# EAGLE board ioboard (EAGLE 9.6.2)
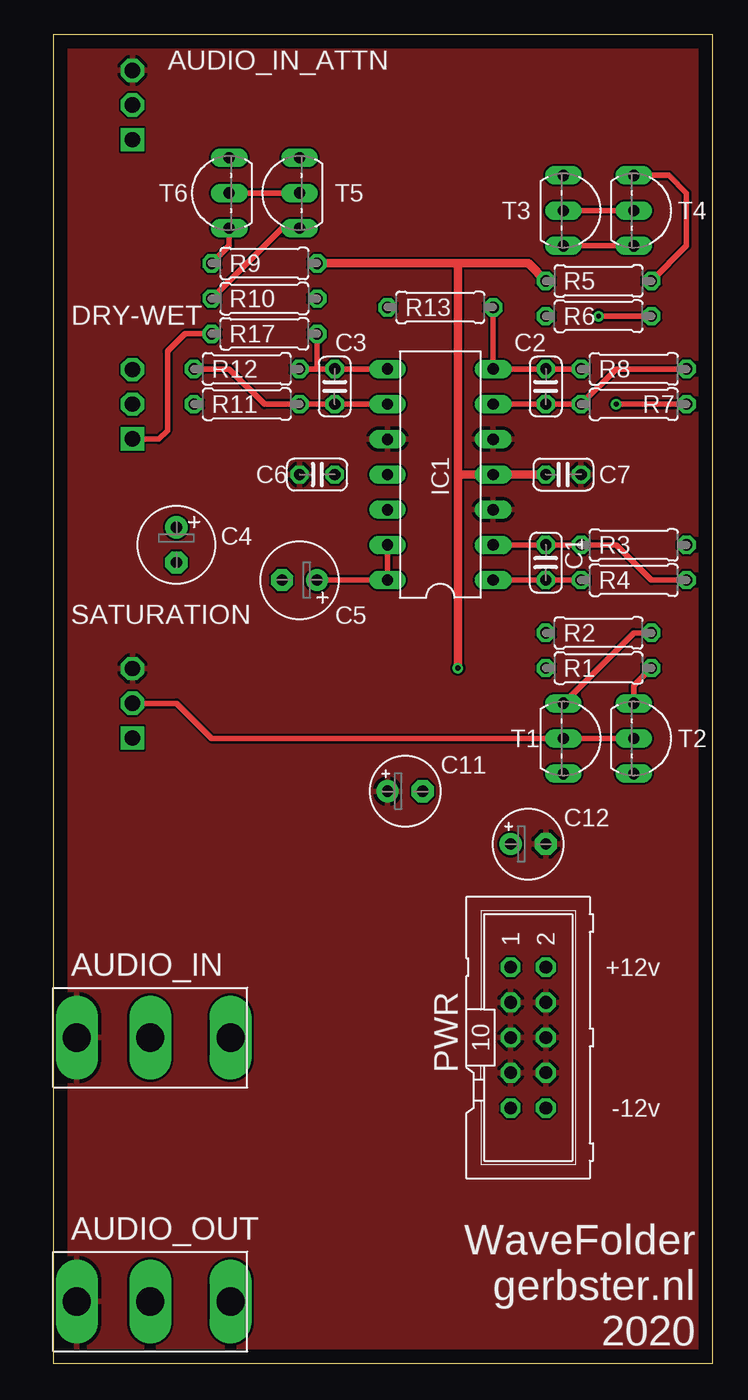
[diagram p0: board, top side]
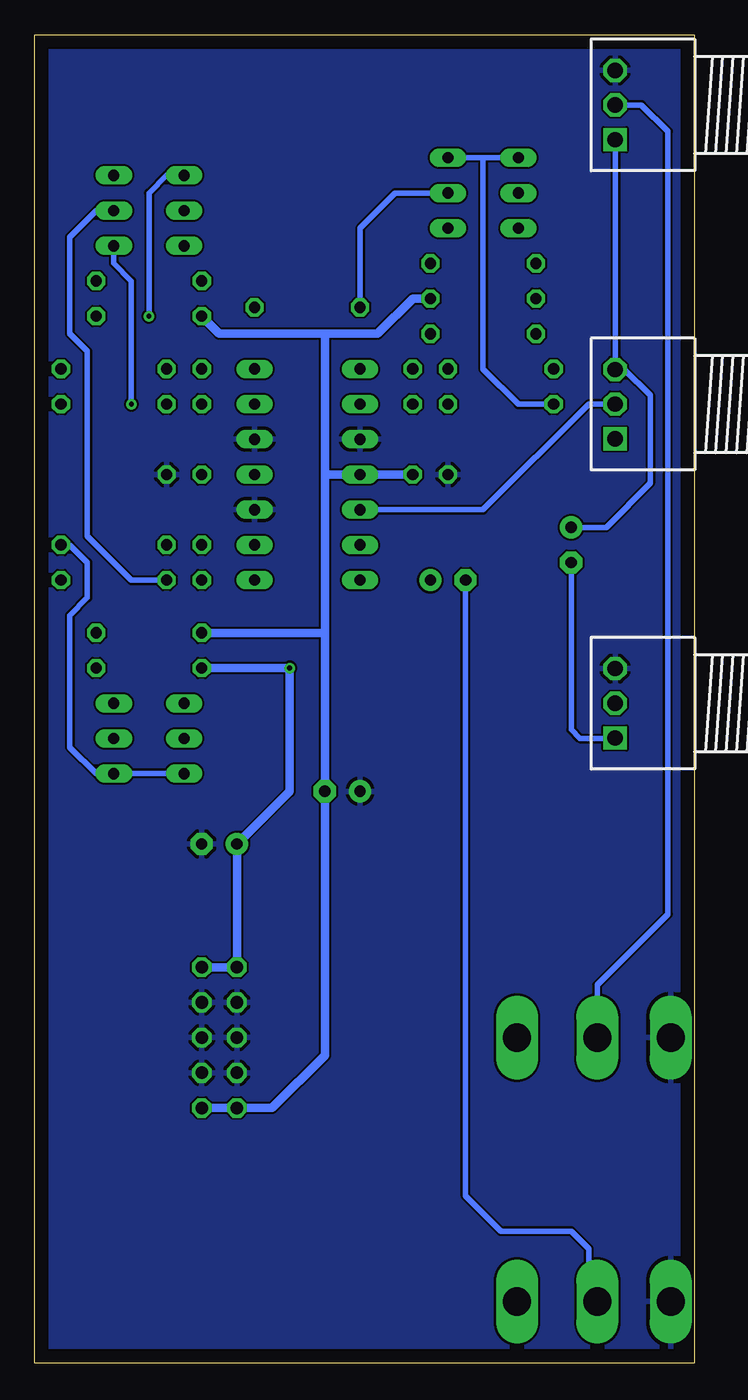
[diagram p1: board, bottom side, seen from below]

Size 47.62 x 95.89 mm. Coordinates in mm from the lower left corner, seen from the top.
Outline: 0,0 47.62,0 47.62,95.89 0,95.88 0,0
Copper layers (1*16): Top 0.035mm / dielectric 1.5mm / Bottom 0.035mm
Design rules "default": minimum track width 6mil, minimum drill 0.35mm, track to track 6mil, track to pad 6mil, pad to pad 6mil, via to via 6mil, smd to smd 6mil, copper to edge 40mil, drill to drill 6mil, minimum pad ring 10mil, minimum via ring 8mil, stop-mask expansion 4mil, vias tented up to drill 0mil, thermal gap 10mil

## Footprints (pad centres in the part's own frame; a part is rotated, then mirrored left to right if it is on the bottom)
PJ-323 = drill 2.032 pad 2.54 long: $1 0,-1.7; $2 0,-7; $3 0,-12.8
EVUF = drill 1.1 pad 1.676 square: 1 -2.5,0 | drill 1.1 pad 1.676 octagon: 2 0,0; 3 2.5,0
C025-024X044 = drill 0.813 octagon: 1 -1.27,0; 2 1.27,0
E2,5-6 = drill 0.813 pad 1.6: + -1.27,0 | drill 0.813 pad 1.6 octagon: - 1.27,0
E2,5-5 = drill 0.813 pad 1.6: + -1.27,0 | drill 0.813 pad 1.6 octagon: - 1.27,0
DIL14 = drill 0.813 long: 1 -7.62,-3.81; 2 -5.08,-3.81; 3 -2.54,-3.81; 4 0,-3.81; 5 2.54,-3.81; 6 5.08,-3.81; 7 7.62,-3.81; 8 7.62,3.81; 9 5.08,3.81; 10 2.54,3.81; 11 0,3.81; 12 -2.54,3.81; 13 -5.08,3.81; 14 -7.62,3.81
ML10 = drill 0.914 octagon: 1 -5.08,-1.27; 2 -5.08,1.27; 3 -2.54,-1.27; 4 -2.54,1.27; 5 0,-1.27; 6 0,1.27; 7 2.54,-1.27; 8 2.54,1.27; 9 5.08,-1.27; 10 5.08,1.27
0207/7 = drill 0.813 octagon: 1 -3.81,0; 2 3.81,0
TO92-EBC = drill 0.813 long: B 0,-1.27; C 2.54,-1.27; E -2.54,-1.27

## Placement (x,y rotation side)
AUDIO_IN  [PJ-323]  0,23.5 90 top
AUDIO_IN_ATTN  100K lin  [EVUF]  5.71,90.81 90 top
AUDIO_OUT  [PJ-323]  0,4.45 90 top
C1  47pF  [C025-024X044]  35.56,57.78 270 top
C2  47pF  [C025-024X044]  35.56,70.48 90 top
C3  47pF  [C025-024X044]  20.32,70.48 90 top
C4  10uF/25V  [E2,5-6]  8.89,59.05 270 top
C5  10uF/25V  [E2,5-6]  17.78,56.52 180 top
C6  .1uF  [C025-024X044]  19.05,64.14 0 top
C7  .1uF  [C025-024X044]  36.83,64.14 180 top
C11  10uf  [E2,5-5]  25.4,41.27 0 top
C12  10uf  [E2,5-5]  34.29,37.47 0 top
DRY-WET  100K lin  [EVUF]  5.71,69.22 90 top
IC1  TL074P  [DIL14]  27.94,64.14 90 top
PWR  [ML10]  34.29,23.5 270 top
R1  22K  [0207/7]  39.37,50.16 180 top
R2  22K  [0207/7]  39.37,52.7 0 top
R3  10K  [0207/7]  41.91,59.05 0 top
R4  47K  [0207/7]  41.91,56.52 0 top
R5  22K  [0207/7]  39.37,78.11 180 top
R6  22K  [0207/7]  39.37,75.56 0 top
R7  2.2K  [0207/7]  41.91,69.22 0 top
R8  15K  [0207/7]  41.91,71.75 0 top
R9  22K  [0207/7]  15.24,79.38 0 top
R10  22K  [0207/7]  15.24,76.83 180 top
R11  10k  [0207/7]  13.97,69.22 180 top
R12  10K  [0207/7]  13.97,71.75 180 top
R13  5.6K  [0207/7]  27.94,76.2 0 top
R17  10K  [0207/7]  15.24,74.3 0 top
SATURATION  100K lin  [EVUF]  5.71,47.62 90 top
T1  [TO92-EBC]  38.1,45.09 270 top
T2  [TO92-EBC]  43.18,45.09 270 top
T3  [TO92-EBC]  38.1,83.19 270 top
T4  [TO92-EBC]  43.18,83.19 270 top
T5  [TO92-EBC]  16.51,84.45 90 top
T6  [TO92-EBC]  11.43,84.45 90 top

## Library data of the parts
AUDIO_IN AUDIO_IN_ATTN AUDIO_OUT DRY-WET SATURATION = gerbster
C1-C7 = rcl; SPICEPREFIX: C
C11 C12 = resistor
IC1 = linear
PWR = con-ml; OC_FARNELL: unknown; OC_NEWARK: unknown
R1-R13 R17 = rcl; SPICEPREFIX: R
T1-T6 = transistor-neu-to92

## Nets
+12V: C7.2 C12.+ IC1.4 PWR.1 PWR.2 R1.2 R5.2 R9.2
-12V: C6.2 C11.- IC1.11 PWR.9 PWR.10 R2.1 R6.1 R10.1
GND: AUDIO_IN.$1 AUDIO_IN_ATTN.3 AUDIO_OUT.$1 C6.1 C7.1 C11.+ C12.- IC1.3 IC1.5 IC1.10 PWR.3 PWR.4 PWR.5 PWR.6 PWR.7 PWR.8 SATURATION.3
N$1: R3.2 T1.C T2.C
N$2: SATURATION.2 T1.B T2.B
N$3: R1.1 T2.E
N$4: R2.2 T1.E
N$5: C1.1 IC1.2 R3.1 R4.2
N$6: C1.2 IC1.1 R4.1 T3.B T4.B
N$7: R7.2 T3.C T4.C
N$8: C4.- SATURATION.1
N$9: R5.1 T4.E
N$10: R6.2 T3.E
N$11: C2.1 IC1.6 R7.1 R8.2
N$12: C2.2 IC1.7 R8.1 R13.2
N$13: R11.2 T5.C T6.C
N$14: R13.1 T5.B T6.B
N$15: R9.1 T6.E
N$16: R10.2 T5.E
N$17: C3.1 IC1.9 R11.1 R12.2
N$18: C3.2 IC1.8 R12.1 R17.2
N$19: AUDIO_IN.$2 AUDIO_IN_ATTN.2
N$20: AUDIO_IN_ATTN.1 C4.+ DRY-WET.3
N$21: DRY-WET.1 R17.1
N$22: DRY-WET.2 IC1.12
N$23: C5.+ IC1.13 IC1.14
N$24: AUDIO_OUT.$2 C5.-

## Tracks (layer width: path | path; a pad name or v marks a point on that pad's centre or on a via)
+12V  (via drill 0.35)
  Top 0.61: C7.2 IC1.4 29.21,64.14 | 29.21,64.14 v29.21,50.16 | 29.21,64.14 29.21,79.38 | 29.21,79.38 34.29,79.38 R5.2 | 29.21,79.38 R9.2
  Bottom 0.61: PWR.2 PWR.1 C12.+ 29.21,41.27 v29.21,50.16 R1.2
-12V
  Bottom 0.61: C6.2 IC1.11 26.67,64.14 | PWR.10 PWR.9 30.48,18.41 26.67,22.23 C11.- 26.67,52.7 | 26.67,52.7 26.67,64.14 | 26.67,64.14 26.67,74.3 | R6.1 34.29,74.3 26.67,74.3 | R10.1 20.32,76.83 22.86,74.3 26.67,74.3 | R2.1 26.67,52.7
GND
  pour Top: 0,95.89 47.62,95.89 47.62,0 0,0
  pour Bottom: 0,95.89 0,0 47.62,0 47.62,95.89
N$1
  Bottom 0.406: T1.C T2.C 43.18,42.55 45.09,44.45 45.09,53.98 43.81,55.24 43.81,57.78 45.09,59.05 R3.2
N$2
  Top 0.406: T2.B T1.B 11.43,45.09 8.89,47.62 SATURATION.2
N$3
  Top 0.406: T2.E 41.91,48.9 R1.1
N$4
  Top 0.406: R2.2 41.91,52.7 T1.E
N$5
  Top 0.406: IC1.2 C1.1 R3.1 40.64,59.05 43.18,56.52 R4.2
N$6
  Top 0.406: IC1.1 C1.2 R4.1 | T4.B T3.B
  Bottom 0.406: T4.B 43.18,83.19 45.09,81.28 45.09,74.3 43.81,73.03 43.81,59.69 40.64,56.52 R4.1
N$7  (via drill 0.35)
  Top 0.406: T3.C T4.C | v40.64,69.22 R7.2
  Bottom 0.406: T4.C 41.91,79.38 40.64,78.11 v40.64,69.22
N$8
  Bottom 0.406: C4.- 8.89,45.72 8.26,45.09 5.75,45.09 SATURATION.1
N$9
  Top 0.406: T4.E 44.45,85.72 45.72,84.45 45.72,80.64 R5.1
N$10  (via drill 0.35)
  Top 0.406: v39.37,75.56 R6.2
  Bottom 0.406: T3.E 38.1,85.72 39.37,84.45 v39.37,75.56
N$11
  Top 0.406: IC1.6 C2.1 R7.1 40.64,71.75 R8.2
N$12
  Top 0.406: R13.2 IC1.7 C2.2 R8.1
N$13
  Bottom 0.406: 15.24,87 T5.C | T6.C 15.24,87 | 15.24,87 15.24,71.75 12.7,69.22 R11.2
N$14
  Top 0.406: T5.B T6.B
  Bottom 0.406: T5.B 21.59,84.45 24.13,81.92 R13.1
N$15
  Top 0.406: T6.E 12.7,80.64 R9.1
N$16
  Top 0.406: T5.E 16.51,81.92 R10.2
N$17
  Top 0.406: IC1.9 C3.1 R11.1 15.24,69.22 12.7,71.75 R12.2
N$18
  Top 0.406: C3.2 R12.1 | R17.2 19.05,71.75 C3.2 | C3.2 IC1.8
N$19
  Bottom 0.406: AUDIO_IN.$2 7,27.29 1.91,32.38 1.91,88.9 3.81,90.81 AUDIO_IN_ATTN.2
N$20
  Bottom 0.406: AUDIO_IN_ATTN.1 DRY-WET.3 5.04,71.72 3.17,69.85 3.17,63.5 6.35,60.33 C4.+
N$21
  Top 0.406: R17.1 9.53,74.3 8.26,73.03 8.26,67.31 7.62,66.67 5.75,66.67 DRY-WET.1
N$22
  Bottom 0.406: IC1.12 15.24,61.59 7.62,69.22 DRY-WET.2
N$23
  Top 0.406: IC1.13 IC1.14 C5.+
N$24
  Bottom 0.406: AUDIO_OUT.$2 7.62,5.71 7.62,8.26 8.89,9.53 13.97,9.53 16.51,12.06 C5.-

## Text on the board
tNames: +12v | -12v | WaveFolder / gerbster.nl / 2020